# EAGLE board BLE -- HM-10 -- Breakout v0.9.3brd (EAGLE 6.4)
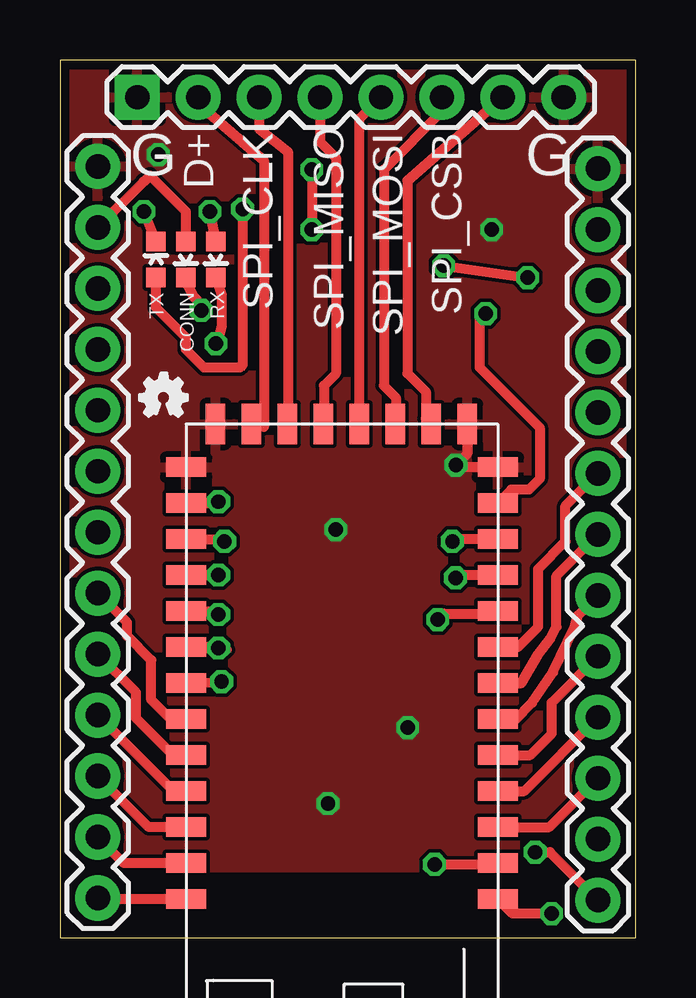
[diagram p0: board, top side]
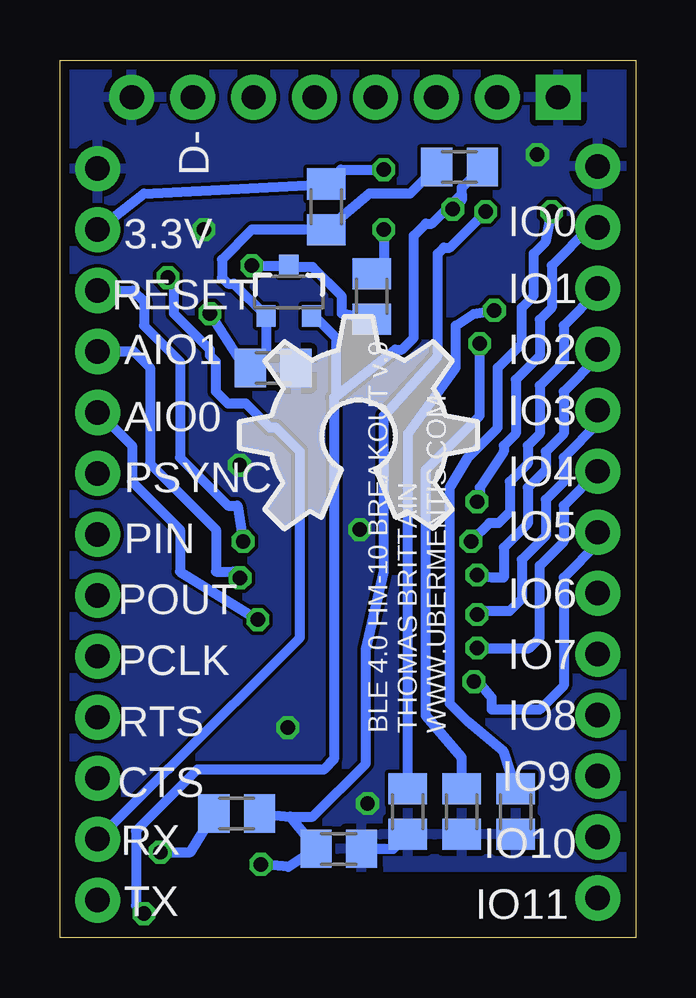
[diagram p1: board, bottom side, seen from below]

Size 24 x 36.57 mm. Coordinates in mm from the lower left corner, seen from the top.
Outline: 0,0 24,0 24,36.57 0,36.57 0,0
Copper layers (1*16): Top 0.0356mm / dielectric 1.5011mm / Bottom 0.0356mm
Design rules "LaenPCBOrder *": minimum track width 12mil, minimum drill 13mil, track to track 6mil, track to pad 6mil, pad to pad 6mil, via to via 6mil, smd to smd 6mil, copper to edge 15mil, drill to drill 6mil, minimum pad ring 7mil, minimum via ring 7mil, stop-mask expansion 4mil, vias tented up to drill 0mil, thermal gap 10mil

## Footprints (pad centres in the part's own frame; a part is rotated, then mirrored left to right if it is on the bottom)
SOT23-3 = smd 0.8 x 0.9: 1 -0.95,-1; 2 0.95,-1; 3 0,1.1
1X13 = drill 1.016 pad 1.88: 1 0,0; 2 2.54,0; 3 5.08,0; 4 7.62,0; 5 10.16,0; 6 12.7,0; 7 15.24,0; 8 17.78,0; 9 20.32,0; 10 22.86,0; 11 25.4,0; 12 27.94,0; 13 30.48,0
1X08 = drill 1.016 pad 1.88 square: 1 0,0 | drill 1.016 pad 1.88: 2 2.54,0; 3 5.08,0; 4 7.62,0; 5 10.16,0; 6 12.7,0; 7 15.24,0; 8 17.78,0
LED-0603 = smd 0.8 x 0.8: A 0,-0.75; C 0,0.75
M0805 = smd 1.3 x 1.6: 1 -0.95,0; 2 0.95,0
BLE-HM-10 = smd 1.676 x 0.813: 3.3V 0,3.29; AIO0 0,7.79; AIO1 0,6.29; GND1 0,1.79; GND4 13,1.79; PCM_CLK 0,13.79; PCM_IN 0,10.79; PCM_OUT 0,12.29; PCM_SYNC 0,9.29; PIO0 13,3.29; PIO1 13,4.79; PIO2 13,6.29; PIO3 13,7.79; PIO4 13,9.29; PIO5 13,10.79; PIO6 13,12.29; PIO7 13,13.79; PIO8 13,15.29; PIO9 13,16.79; PIO10 13,18.29; PIO11 13,19.79; RESET 0,4.79; UART_CTS 0,16.79; UART_RTS 0,15.29; UART_RX 0,18.29; UART_TX 0,19.79 | smd 0.813 x 1.676: GND2 1.27,0; GND3 11.77,0; SPI_CLK 8.77,0; SPI_CSB 4.27,0; SPI_MISO 7.27,0; SPI_MOSI 5.77,0; USB_D+ 10.27,0; USB_D- 2.77,0

## Placement (x,y rotation side)
BSS138  MOSFET-NCHANNELSMD  [SOT23-3]  14.46,26.9 0 bottom
JP1  M13  [1X13]  22.43,32.04 270 top
JP2  M13  [1X13]  1.58,1.65 90 top
JP3  [1X08]  3.22,35.02 0 top
LED1  [LED-0603]  4,28.25 0 top
LED2  [LED-0603]  5.25,28.25 180 top
LED3  [LED-0603]  6.5,28.25 180 top
R1  10k  [M0805]  12.89,30.45 90 bottom
R2  20k  [M0805]  15.12,23.73 180 bottom
R3  10k  [M0805]  16.63,5.16 0 bottom
R4  10k  [M0805]  12.37,3.7 0 bottom
R5  10k  [M0805]  11,26.72 90 bottom
R6  10k  [M0805]  7.34,32.11 180 bottom
R7  220  [M0805]  9.5,5.25 90 bottom
R8  220  [M0805]  7.25,5.25 90 bottom
R9  220  [M0805]  5,5.25 90 bottom
U$1  BLE-HM-10  [BLE-HM-10]  18.26,21.4 180 top
U$2  [OSHW_FILLX350_NOTEXT]  16.51,17.02 0 bottom
U$3  [OSHW_FILLX70_NOTEXT]  3.32,21.73 0 top

## Library data of the parts
BSS138 JP1-JP3 LED1-LED3 = SparkFun
R1-R9 = resistor
U$1 = Random parts
U$2 U$3 = ohw-logo

## Nets
3_3V: BSS138.1 R1.1 R2.2 R6.2 U$1.3.3V
5V: JP1.2 R1.2 R5.2
GND: JP1.1 JP2.13 JP3.1 JP3.8 R2.1 R4.2 R7.1 R8.1 R9.1 U$1.GND1 U$1.GND2 U$1.GND3 U$1.GND4
HVTX->LVRX: LED3.A R3.2 R4.1 U$1.UART_RX
LVRX->HVTX: BSS138.2 LED1.A R6.1 U$1.UART_TX
N$3: JP1.3 U$1.RESET
N$4: JP1.4 U$1.AIO1
N$5: JP1.5 U$1.AIO0
N$6: JP1.6 U$1.PCM_SYNC
N$7: JP1.7 U$1.PCM_IN
N$8: JP1.8 U$1.PCM_OUT
N$9: JP1.9 U$1.PCM_CLK
N$10: JP1.10 U$1.UART_RTS
N$11: JP1.11 U$1.UART_CTS
N$14: JP2.1 U$1.PIO11
N$15: JP2.2 U$1.PIO10
N$16: JP2.3 U$1.PIO9
N$17: JP2.4 U$1.PIO8
N$18: JP2.5 U$1.PIO7
N$19: JP2.6 U$1.PIO6
N$20: JP2.7 U$1.PIO5
N$21: JP2.8 U$1.PIO4
N$22: JP2.9 U$1.PIO3
N$23: JP2.10 U$1.PIO2
N$24: JP2.11 U$1.PIO1
N$25: JP2.12 LED2.A U$1.PIO0
N$26: LED2.C R7.2
N$28: JP3.2 U$1.USB_D+
N$29: JP3.3 U$1.SPI_CLK
N$30: JP3.4 U$1.SPI_MISO
N$31: JP3.5 U$1.SPI_MOSI
N$32: JP3.6 U$1.SPI_CSB
N$33: JP3.7 U$1.USB_D-
N$34: LED1.C R9.2
N$35: LED3.C R8.2
RX_HV: BSS138.3 JP1.12 R5.1
TX_HV: JP1.13 R3.1

## Tracks (layer width: path | path; a pad name or v marks a point on that pad's centre or on a via)
3_3V  (via drill 0.6)
  Top 0.406: 17.75,26.25 v17.75,26 17.5,25.75 17.5,23.75 20,21.25 20,19.11 19.56,18.67 18.82,18.67 U$1.3.3V
  Bottom 0.406: v17.75,26 16.57,24.18 R2.2 15.41,24.39 BSS138.1 16.75,27.25 17,27.25 17.25,27.5 17.25,28.25 16,29.5 R1.1 11.1,31 9.4,31 R6.2
5V  (via drill 0.6)
  Top 0.406: v10.5,32 v10.5,29.5
  Bottom 0.406: JP1.2 20.5,31 R1.2 12.29,32 v10.5,32 | v10.5,29.5 10.5,28.16 R5.2
GND  (via drill 0.6)
  Top 0.406: U$1.GND1 16.59,19.61 v16.51,19.68 16.99,20.16 U$1.GND2
  Bottom 0.406: R4.2 10.1,3.7 R7.1
  other vias: 4.1,32.62 18,29.5 11.5,17 14.5,8.75 11.18,5.59
  pour Bottom: -0.51,2.92 24.64,2.92 24.64,37.34 -0.51,37.34
  pour Top: 0.5,36 0.5,2.93 24,2.93 24,36.5 0.5,36.5 0.5,36
HVTX->LVRX  (via drill 0.6)
  Top 0.406: v15.62,3.05 18.2,3.05 U$1.UART_RX | LED3.A v6.25,30.25
  Bottom 0.406: R3.2 14.41,5.04 | 14.41,5.04 R4.1 14.47,2.95 v15.62,3.05 | 14.41,5.04 13.46,5.04 11.25,7.25 11.25,12 10.5,15.25 10.5,21.75 8.25,24.25 8.25,28.5 8,28.75 7.75,28.75 v6.25,30.25
LVRX->HVTX  (via drill 0.6)
  Top 0.406: v20.5,1 18.87,1 U$1.UART_TX | v7.62,30.35 7.62,23.87 7.5,23.75 6,23.75 5.25,24.5 5.25,25 4,26.25 LED1.A
  Bottom 0.406: 12.57,22.5 10.03,24.5 9.75,24.5 9.25,25 9.25,29.25 8.75,29.75 8.5,29.75 7.25,31 | v20.5,1 20.83,1.33 20.83,4.45 18.27,7 13,7 12.57,7.43 12.57,22.5 | BSS138.2 13.4,25.9 12.5,25 12.5,22.57 12.57,22.5 | 7.25,31 7.25,31.25 R6.1 | 7.25,31 7.25,30.72 v7.62,30.35
N$3  (via drill 0.6)
  Top 0.406: U$1.RESET 16.46,16.61 v16.36,16.51
  Bottom 0.406: JP1.3 20.96,26.96 20.5,26.5 20.5,25.5 19,24 19,20 17,18 16.6,18 v16.36,16.51
N$4  (via drill 0.6)
  Top 0.406: U$1.AIO1 16.62,15.11 v16.5,14.99
  Bottom 0.406: JP1.4 20.92,24.42 20.25,23.75 20.25,19.75 17.5,17 17.5,15.25 16.76,15.25 v16.5,14.99
N$5  (via drill 0.6)
  Top 0.406: v15.75,13.25 16,13.5 18.15,13.5 U$1.AIO0
  Bottom 0.406: JP1.5 22.38,21.88 21,20.5 21,19 19,17 19,15.25 v15.75,13.25
N$6
  Top 0.406: U$1.PCM_SYNC 19.09,12.11 19.94,12.95 19.94,15.37 21.08,16.51 21.08,17.99 JP1.6
N$7
  Top 0.406: U$1.PCM_IN 19.24,10.61 19.95,11.81 20.45,12.45 20.7,12.95 20.7,15.07 JP1.7
N$8
  Top 0.406: U$1.PCM_OUT 19.01,9.11 19.68,9.78 20.56,11.05 21.46,12.95 21.59,13.42 JP1.8
N$9
  Top 0.406: U$1.PCM_CLK 19.61,7.61 20.5,8.5 20.5,9.79 JP1.9
N$10
  Top 0.406: U$1.UART_RTS 19.36,6.11 JP1.10
N$11
  Top 0.406: U$1.UART_CTS 20.4,4.61 JP1.11
N$14
  Top 0.406: U$1.PIO11 1.62,1.61 JP2.1
N$15
  Top 0.406: U$1.PIO10 2.66,3.11 JP2.2
N$16
  Top 0.406: U$1.PIO9 3.7,4.61 JP2.3
N$17
  Top 0.406: U$1.PIO8 4.74,6.11 JP2.4
N$18
  Top 0.406: U$1.PIO7 4.71,7.61 3.17,9.14 3.17,10.21 JP2.5
N$19
  Top 0.406: U$1.PIO6 4.61,9.11 3.81,9.91 3.81,11.56 2.79,12.57 2.79,13.13 JP2.6
N$20  (via drill 0.6)
  Top 0.406: U$1.PIO5 5.68,10.61 v6.74,10.67
  Bottom 0.406: JP2.7 1.58,16.42 3,15 3,10.5 4,9.5 6,9.5 6,10 6.41,10.5 v6.74,10.67
N$21  (via drill 0.6)
  Top 0.305: U$1.PIO4 6,12 7,12 v6.61,12.06
  Top 0.406: U$1.PIO4 6.14,12.11 6.5,12
  Bottom 0.406: v6.61,12.06 4.43,12.06 4,12.5 4,15.5 3,16.5 3,18 JP2.8
N$22  (via drill 0.6)
  Top 0.406: U$1.PIO3 6.47,13.61 v6.61,13.46
  Bottom 0.406: JP2.9 1.58,21.42 3,20 3,19 3.75,18.25 3.75,16.75 4.75,15.75 4.75,14.12 U$1.PIO3 6.22,13.61 v6.61,13.46
N$23  (via drill 0.6)
  Top 0.406: U$1.PIO2 6.14,15.11 | 6.14,15.11 6.5,15 | 6.14,15.11 v6.61,15.11
  Bottom 0.406: JP2.10 1.58,24.17 3,22.75 3,21 3.75,20.25 3.75,19.5 4.5,18.75 4.5,17.25 5.5,16.25 5.5,15 6,15 v6.61,15.11
N$24  (via drill 0.6)
  Top 0.406: U$1.PIO1 6.76,16.61 v6.86,16.51
  Bottom 0.406: JP2.11 1.58,26.92 3,25.5 3,24 4,23 4,21 4.5,20.5 4.5,19.75 5.25,19 5.25,17.74 5.71,17.27 6.1,17.27 v6.86,16.51
N$25  (via drill 0.6)
  Top 0.406: U$1.PIO0 6.14,18.11 6.75,18.25 6.7,18.25 v6.61,18.16 | LED2.A 5.25,30.25 3.75,31.75 3.49,31.5 JP2.12
  Bottom 0.406: JP2.12 1.91,29.59 3.5,28 3.5,26.25 4,25.75 4,24.25 5,23.25 5,21 5.5,20.5 5.5,20.25 6.5,18.75 6.5,18.27 v6.61,18.16
N$26  (via drill 0.6)
  Top 0.406: v5.89,26.14 5.89,26.36 5.58,26.67 5.33,27.17 LED2.C
  Bottom 0.406: R7.2 9.5,21 7.5,23.75 7.5,25.5 6.75,25.99 v5.89,26.14
N$28
  Top 0.406: JP3.2 5.76,34.73 8.5,32.37 8.5,21.28 U$1.USB_D+
N$29
  Top 0.406: JP3.3 8.3,33.7 9.5,32.75 U$1.SPI_CLK
N$30
  Top 0.406: JP3.4 10.85,33.16 11.5,32.5 11.5,23.5 11,23 U$1.SPI_MISO
N$31
  Top 0.406: U$1.SPI_MOSI 12.49,34.12 JP3.5
N$32
  Top 0.406: JP3.6 15.93,34.42 13.5,32 13.5,23 14,22.5 U$1.SPI_CSB
N$33
  Top 0.406: JP3.7 14.49,31.54 14.49,23.51 15.25,22.75 15.25,21.64 U$1.USB_D-
N$34  (via drill 0.6)
  Top 0.406: LED1.C v3.5,30.25
  Bottom 0.406: R9.2 5.5,7.75 7,9 7.75,9.75 7.75,18.75 7,20 5.75,21.25 5.75,23.75 4.75,24.75 4.75,26.25 4.25,26.75 4.25,28.5 3.75,29 v3.5,30.25
N$35  (via drill 0.6)
  Top 0.406: v6.5,24.75 6.5,24.5 6.75,25.5 6.75,26.75 LED3.C
  Bottom 0.406: R8.2 7.25,7.5 8.75,9.25 8.75,19.5 6.5,21.75 v6.5,24.75
RX_HV  (via drill 0.6)
  Top 0.406: v16,28 v19.5,27.5
  Bottom 0.406: R5.1 12.24,26 12.24,26.72 13.46,27.94 14.39,27.94 BSS138.3 v16,28 | JP1.12 19.5,7.03 19.47,7.03 14,12.5 14,20.25 15,21.25 15.25,21.25 16.25,22.25 17,22.25 17.5,22.75 17.5,24 17.75,24.25 17.75,24.5 19.25,26 19.25,27.25 v19.5,27.5
TX_HV  (via drill 0.6)
  Top 0.406: v19.82,3.56 20.44,3.56 JP1.13
  Bottom 0.406: v19.82,3.56 18.55,3.56 R3.1

## Text on the board
tNames: D+ | SPI_CLK | SPI_MISO | SPI_MOSI | SPI_CSB | G | G | TX | RX | CONN
bNames: D- | IO0 | 3.3V | IO1 | RESET | IO2 | AIO1 | IO3 | AIO0 | IO4 | PSYNC | IO5 | PIN | IO6 | POUT | IO7 | PCLK | IO8 | BLE 4.0 HM-10 BREAKOUT v.9 / THOMAS BRITTAIN / WWW.UBERMENTIS.COM | RTS | IO9 | CTS | IO10 | RX | IO11 | TX